# Altium PCB door_clock_ver2.PcbDoc
Units mil, origin at the board's own origin, x right, y up, seen from the top; angles counter-clockwise.
Board outline 3940 x 4715 mil, 2 copper layers (Top Layer, Bottom Layer); 32 components, 49 nets, 122 pads, 0 vias.
Unrouted connection lines stored in the file: 3.
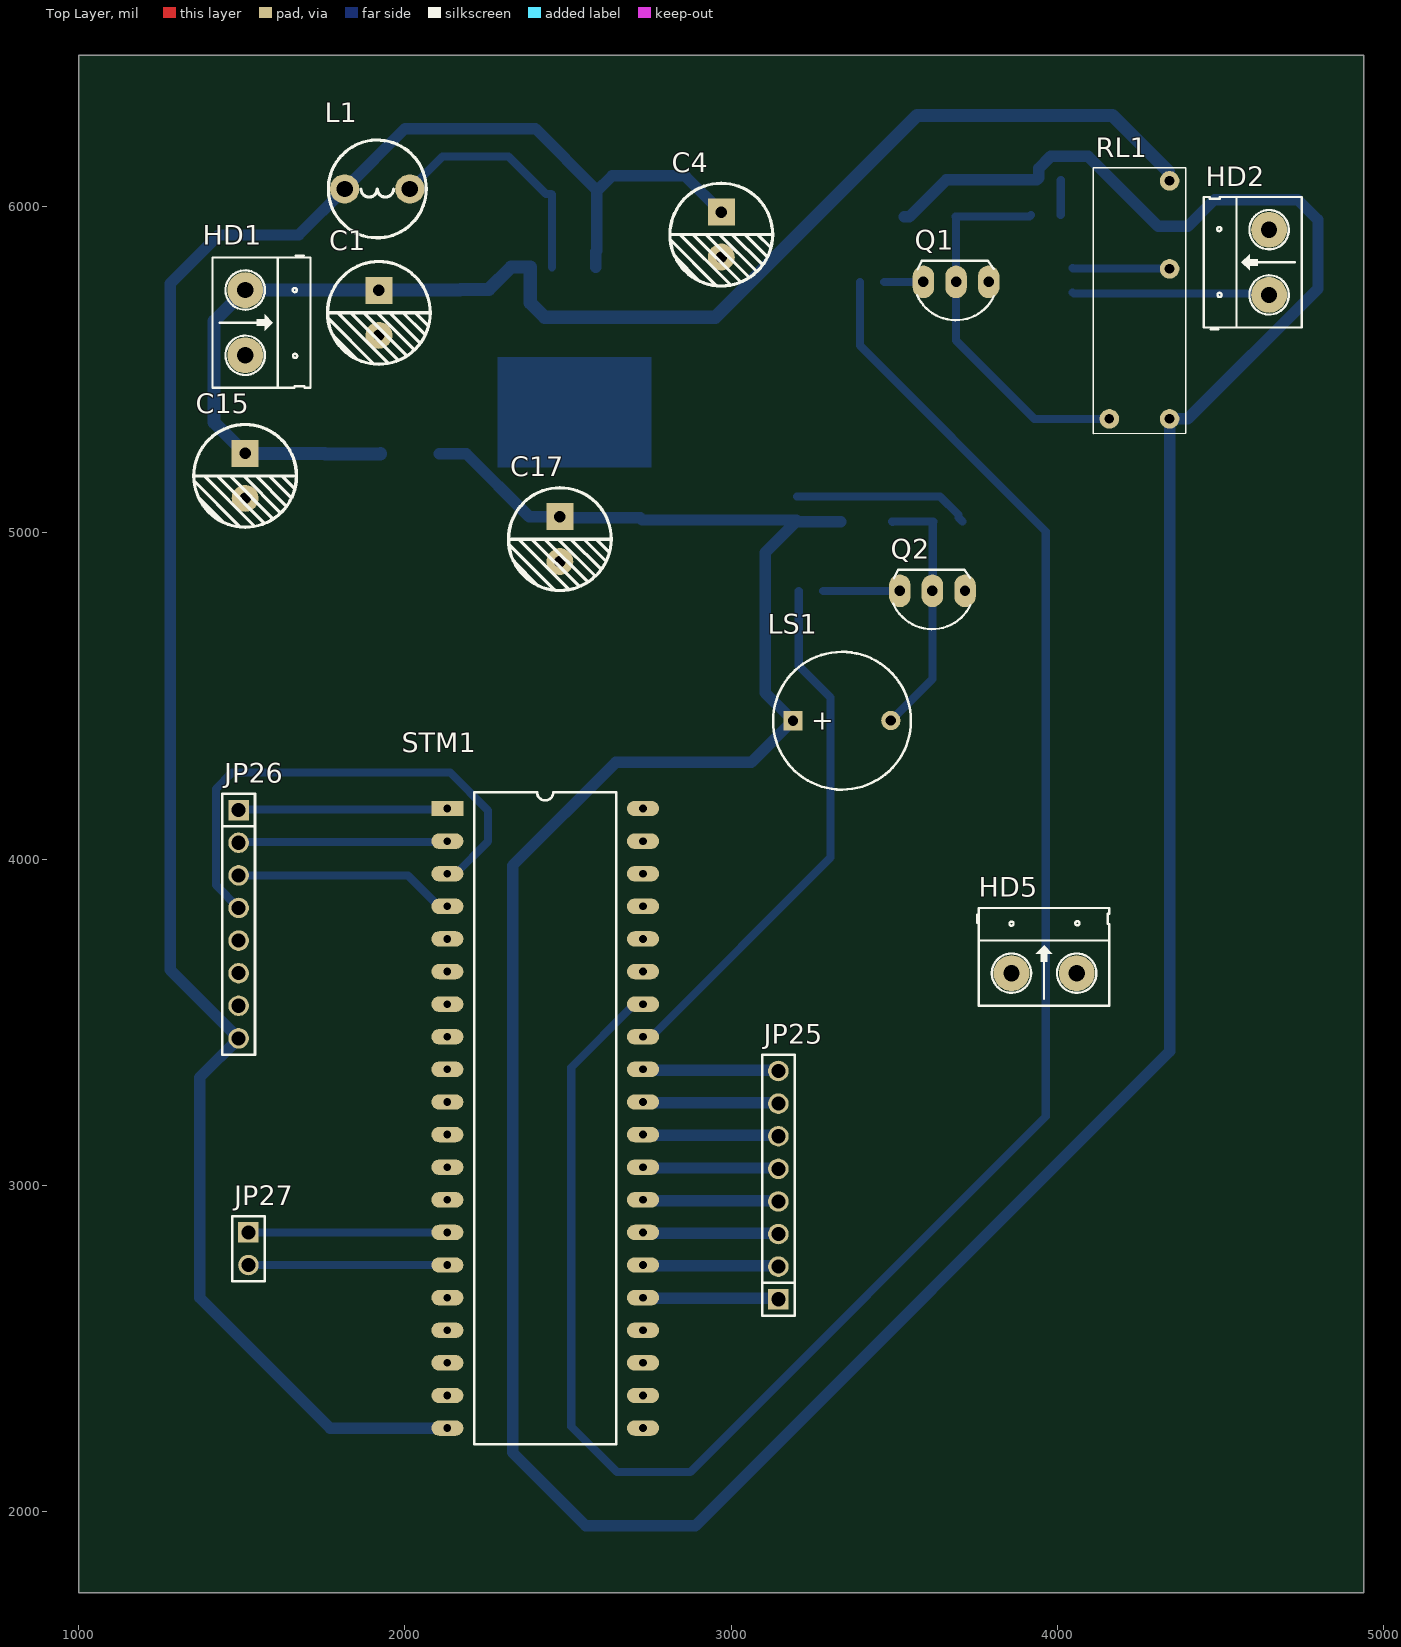
[diagram p0: Top Layer view]
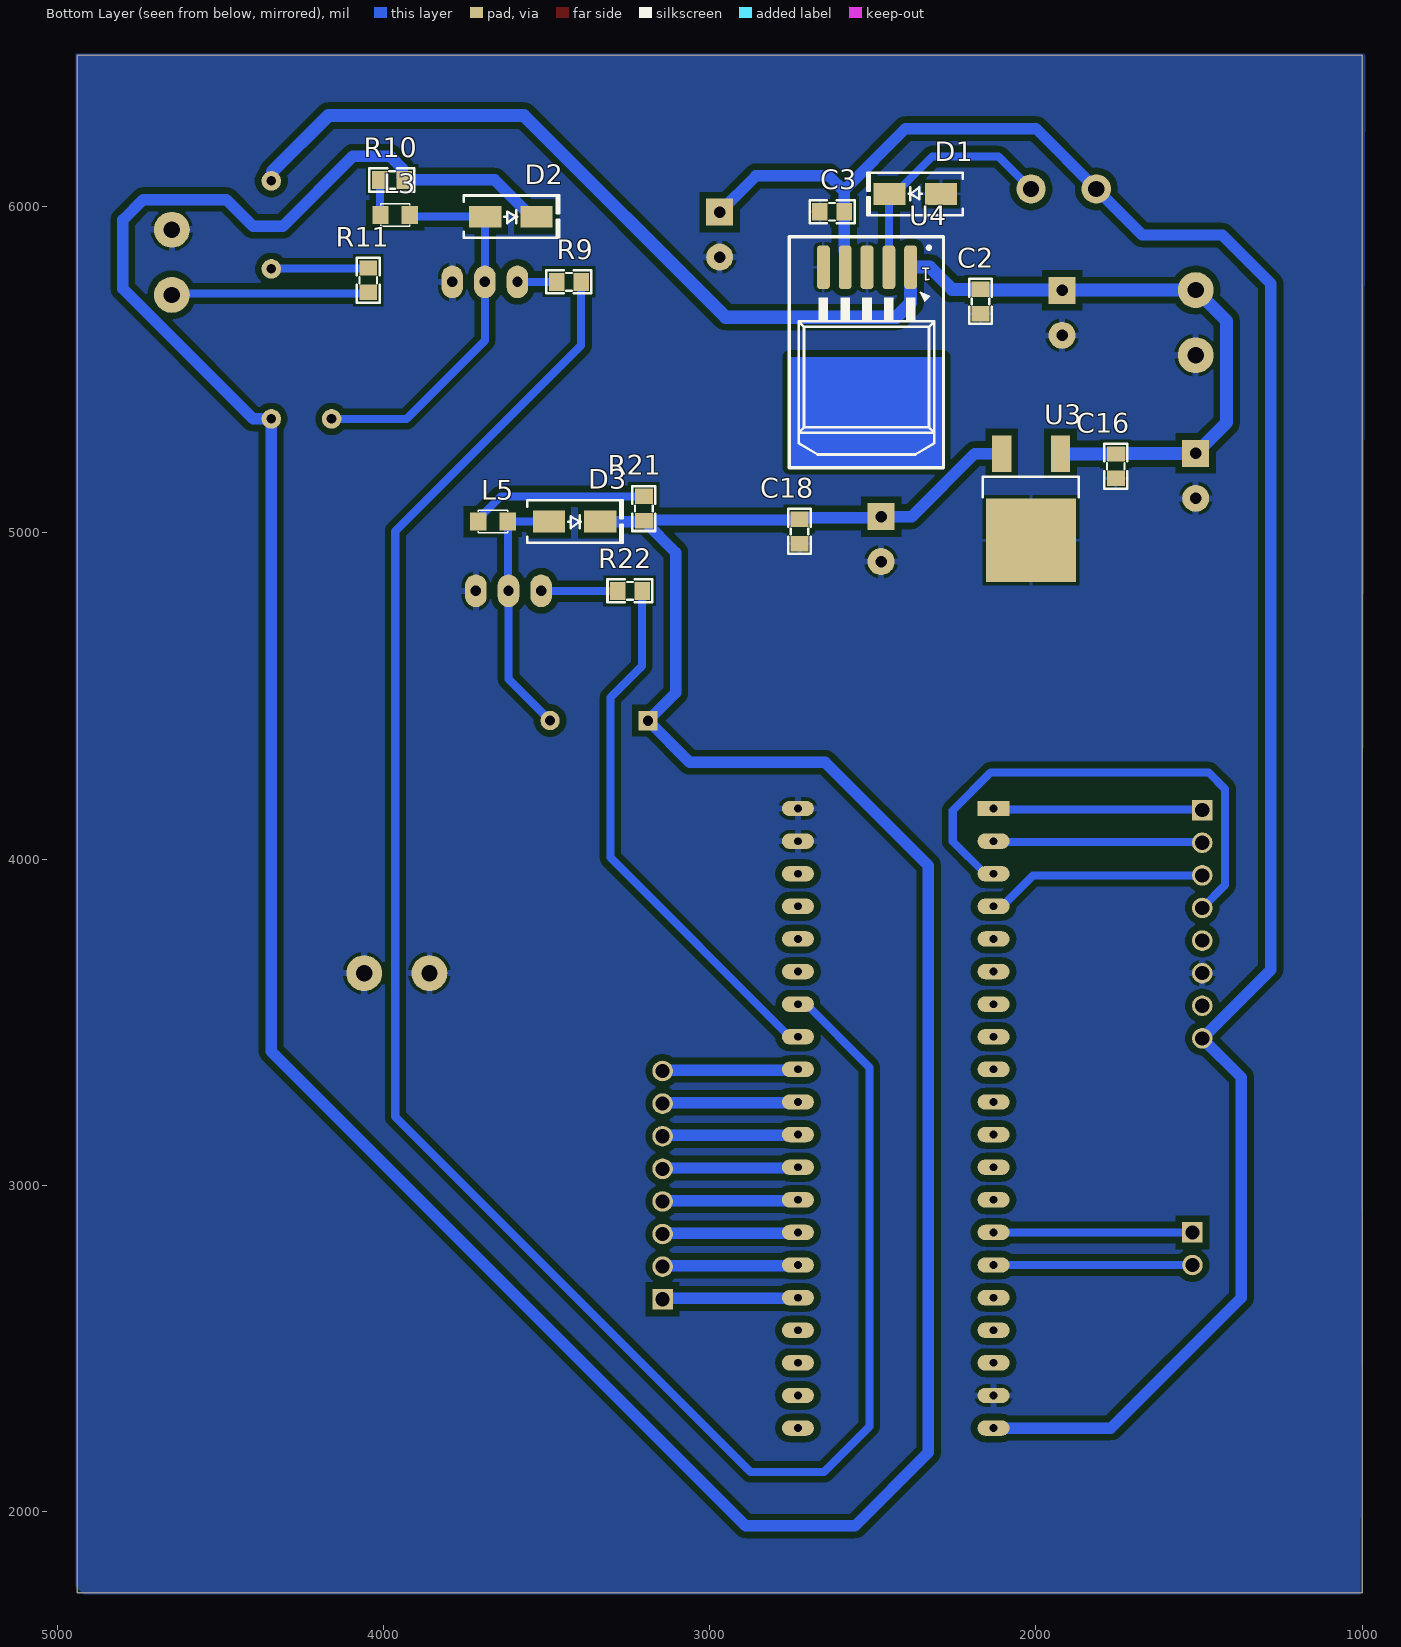
[diagram p1: Bottom Layer view, seen from below]
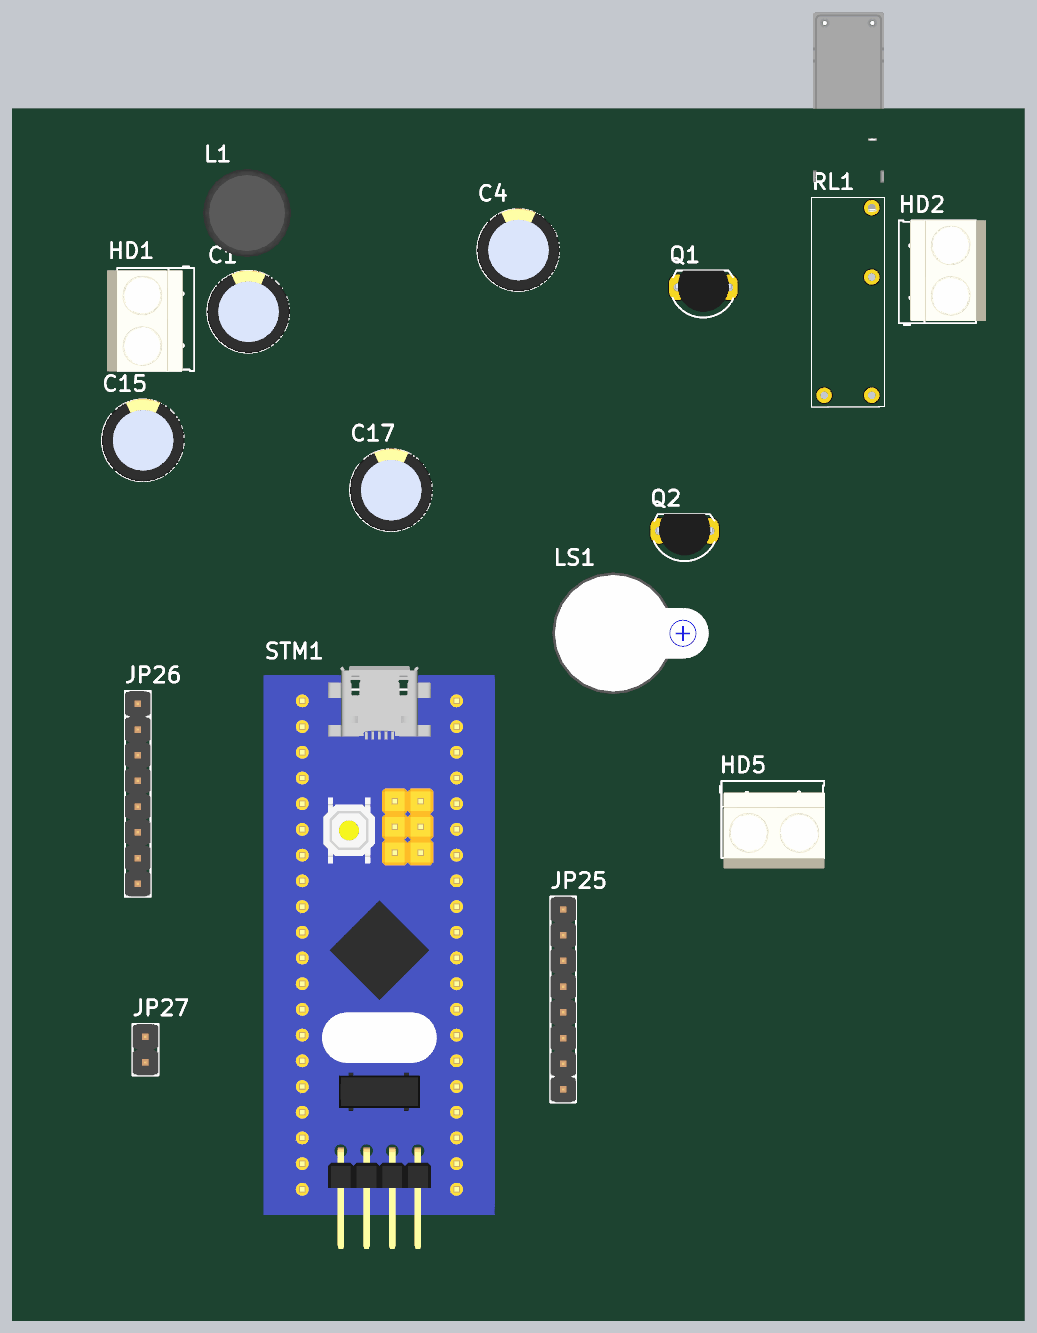
[diagram p2: 3D render of the assembled board from above, using the file's embedded part models]
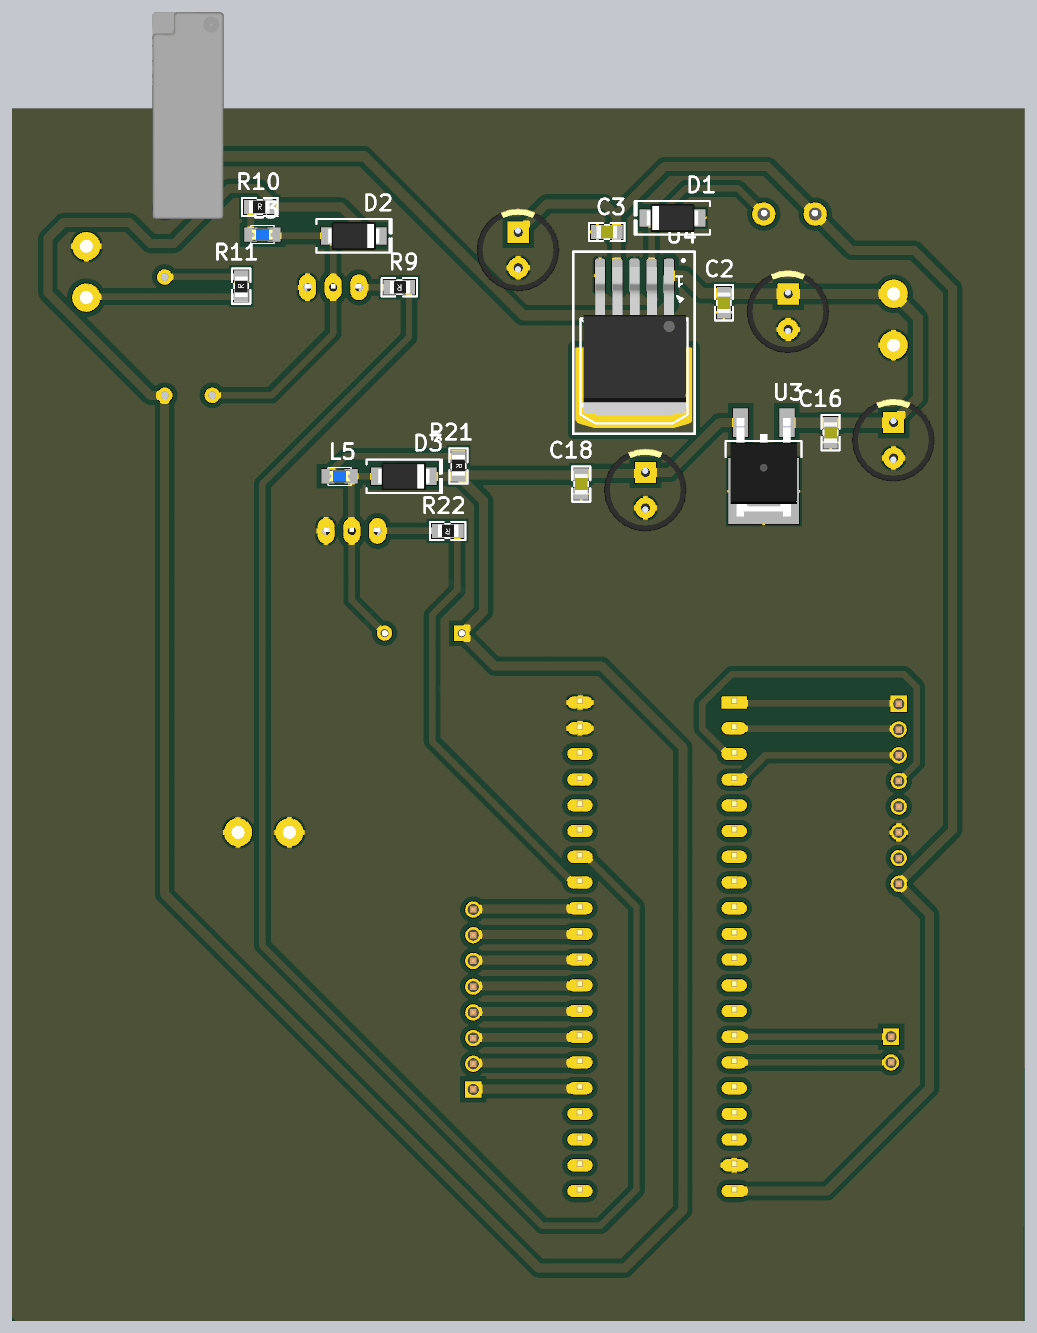
[diagram p3: 3D render of the assembled board from below, using the file's embedded part models]

## Layer stack, top to bottom
Top Solder: solder mask 0.4, Solder Resist, Dk 3.5
Top Layer: signal copper 1.4
Dielectric 1: dielectric 12.6, FR-4, Dk 4.8
Bottom Layer: signal copper 1.4
Bottom Solder: solder mask 0.4, Solder Resist, Dk 3.5

## Board outline
1000,1750 4940,1750 4940,6465 1000,6465

## Design rules (kind name [scope] priority, off if disabled: settings)
Clearance Clearance_9 [InNamedPolygon('NONET_L02_P000')] p1: gap=20 ignorepadtopadclearanceinfootprint=FALSE
Clearance Clearance_8 [InNamedPolygon('NONET_L02_P000')] p2: gap=20 ignorepadtopadclearanceinfootprint=FALSE
Clearance Clearance_7 [InNamedPolygon('NONET_L02_P000')] p3: gap=20 ignorepadtopadclearanceinfootprint=FALSE
Clearance Clearance_6 [InNamedPolygon('NONET_L02_P000')] p4: gap=20 ignorepadtopadclearanceinfootprint=FALSE
Clearance Clearance_5 [InNamedPolygon('NONET_L02_P000')] p5: gap=20 ignorepadtopadclearanceinfootprint=FALSE
Clearance Clearance_4 [InNamedPolygon('NONET_L02_P000')] p6: gap=20 ignorepadtopadclearanceinfootprint=FALSE
Clearance Clearance_3 [InNamedPolygon('NONET_L02_P000')] p7: gap=20 ignorepadtopadclearanceinfootprint=FALSE
Clearance Clearance_2 [InNamedPolygon('NONET_L02_P000')] p8: gap=20 ignorepadtopadclearanceinfootprint=FALSE
Clearance Clearance_1 [InNamedPolygon('GND_L02_P001')] p9: gap=20 ignorepadtopadclearanceinfootprint=FALSE
Clearance [All] p10: gap=20 ignorepadtopadclearanceinfootprint=FALSE
PolygonConnect PolygonConnect_9 [All vs IsNamedPolygon('NONET_L02_P000')] p1: thpad.connectstyle=Relief thpad.reliefconductorwidth=20 thpad.reliefentries=4 thpad.polygonreliefangle="90 Angle" thpad.airgapwidth=10 smdpad.connectstyle=Relief smdpad.reliefconductorwidth=10 smdpad.reliefentries=4 smdpad.polygonreliefangle="90 Angle" smdpad.airgapwidth=10 via.connectstyle=Relief via.reliefconductorwidth=20 via.reliefentries=4 via.polygonreliefangle="90 Angle" via.airgapwidth=10
PolygonConnect PolygonConnect_8 [All vs IsNamedPolygon('NONET_L02_P000')] p2: thpad.connectstyle=Relief thpad.reliefconductorwidth=20 thpad.reliefentries=4 thpad.polygonreliefangle="90 Angle" thpad.airgapwidth=10 smdpad.connectstyle=Relief smdpad.reliefconductorwidth=10 smdpad.reliefentries=4 smdpad.polygonreliefangle="90 Angle" smdpad.airgapwidth=10 via.connectstyle=Relief via.reliefconductorwidth=20 via.reliefentries=4 via.polygonreliefangle="90 Angle" via.airgapwidth=10
PolygonConnect PolygonConnect_7 [All vs IsNamedPolygon('NONET_L02_P000')] p3: thpad.connectstyle=Relief thpad.reliefconductorwidth=20 thpad.reliefentries=4 thpad.polygonreliefangle="90 Angle" thpad.airgapwidth=10 smdpad.connectstyle=Relief smdpad.reliefconductorwidth=10 smdpad.reliefentries=4 smdpad.polygonreliefangle="90 Angle" smdpad.airgapwidth=10 via.connectstyle=Relief via.reliefconductorwidth=20 via.reliefentries=4 via.polygonreliefangle="90 Angle" via.airgapwidth=10
PolygonConnect PolygonConnect_6 [All vs IsNamedPolygon('NONET_L02_P000')] p4: thpad.connectstyle=Relief thpad.reliefconductorwidth=20 thpad.reliefentries=4 thpad.polygonreliefangle="90 Angle" thpad.airgapwidth=10 smdpad.connectstyle=Relief smdpad.reliefconductorwidth=10 smdpad.reliefentries=4 smdpad.polygonreliefangle="90 Angle" smdpad.airgapwidth=10 via.connectstyle=Relief via.reliefconductorwidth=20 via.reliefentries=4 via.polygonreliefangle="90 Angle" via.airgapwidth=10
PolygonConnect PolygonConnect_5 [All vs IsNamedPolygon('NONET_L02_P000')] p5: thpad.connectstyle=Relief thpad.reliefconductorwidth=20 thpad.reliefentries=4 thpad.polygonreliefangle="90 Angle" thpad.airgapwidth=10 smdpad.connectstyle=Relief smdpad.reliefconductorwidth=10 smdpad.reliefentries=4 smdpad.polygonreliefangle="90 Angle" smdpad.airgapwidth=10 via.connectstyle=Relief via.reliefconductorwidth=20 via.reliefentries=4 via.polygonreliefangle="90 Angle" via.airgapwidth=10
PolygonConnect PolygonConnect_4 [All vs IsNamedPolygon('NONET_L02_P000')] p6: thpad.connectstyle=Relief thpad.reliefconductorwidth=20 thpad.reliefentries=4 thpad.polygonreliefangle="90 Angle" thpad.airgapwidth=10 smdpad.connectstyle=Relief smdpad.reliefconductorwidth=10 smdpad.reliefentries=4 smdpad.polygonreliefangle="90 Angle" smdpad.airgapwidth=10 via.connectstyle=Relief via.reliefconductorwidth=20 via.reliefentries=4 via.polygonreliefangle="90 Angle" via.airgapwidth=10
PolygonConnect PolygonConnect_3 [All vs IsNamedPolygon('NONET_L02_P000')] p7: thpad.connectstyle=Relief thpad.reliefconductorwidth=20 thpad.reliefentries=4 thpad.polygonreliefangle="90 Angle" thpad.airgapwidth=10 smdpad.connectstyle=Relief smdpad.reliefconductorwidth=10 smdpad.reliefentries=4 smdpad.polygonreliefangle="90 Angle" smdpad.airgapwidth=10 via.connectstyle=Relief via.reliefconductorwidth=20 via.reliefentries=4 via.polygonreliefangle="90 Angle" via.airgapwidth=10
PolygonConnect PolygonConnect_2 [All vs IsNamedPolygon('NONET_L02_P000')] p8: thpad.connectstyle=Relief thpad.reliefconductorwidth=20 thpad.reliefentries=4 thpad.polygonreliefangle="90 Angle" thpad.airgapwidth=10 smdpad.connectstyle=Relief smdpad.reliefconductorwidth=10 smdpad.reliefentries=4 smdpad.polygonreliefangle="90 Angle" smdpad.airgapwidth=10 via.connectstyle=Relief via.reliefconductorwidth=20 via.reliefentries=4 via.polygonreliefangle="90 Angle" via.airgapwidth=10
PolygonConnect PolygonConnect_1 [All vs IsNamedPolygon('GND_L02_P001')] p9: thpad.connectstyle=Relief thpad.reliefconductorwidth=20 thpad.reliefentries=4 thpad.polygonreliefangle="90 Angle" thpad.airgapwidth=10 smdpad.connectstyle=Relief smdpad.reliefconductorwidth=10 smdpad.reliefentries=4 smdpad.polygonreliefangle="90 Angle" smdpad.airgapwidth=10 via.connectstyle=Relief via.reliefconductorwidth=20 via.reliefentries=4 via.polygonreliefangle="90 Angle" via.airgapwidth=10
PolygonConnect [All] p10: connectstyle=Relief reliefconductorwidth=10 reliefentries=4 polygonreliefangle="90 Angle" airgapwidth=10
RoutingVias [All] p1: holewidth=28 width=50 viastyle="Through Hole" minholewidth=28 minwidth=50 maxholewidth=28 maxwidth=50
SolderMaskExpansion [All] p1: expansion=4 istentingtop=FALSE
Width [All] p1: maxlimit=40 minlimit=25 preferedwidth=35 minimp=50.000000 maximp=50.000000 favimp=50.000000
30 further rules are at their usual default settings.

## Components (designator, comment, footprint, x,y, rotation, side; value= is the part's Value field where it differs from the comment)
C1 "100uF" "tu hoa 8mm" 1920,5675 r270 top
C2 "104" "tu 0805" 2170,5710 r270 bottom
C3 "104" "tu 0805" 2625,5985 r0 bottom
C4 "100uF" "tu hoa 8mm" 2970,5915 r270 top
C15 "100uF" "tu hoa 8mm" 1510,5175 r270 top
C16 "104" "tu 0805" 1755,5205 r270 bottom
C17 "100uF" "tu hoa 8mm" 2475,4981.1 r270 top
C18 "104" "tu 0805" 2725,5005 r270 bottom
D1 "SS34" "DIODE SMA" 2370,6040 r0 bottom
D2 "SS14" "DIODE SMA" 3610,5970 r180 bottom
D3 "SS14" "DIODE SMA" 3415,5035 r180 bottom
HD1 "Header 2" HED2 1510,5745 r270 top
HD2 "Header 2" HED2 4650,5730 r90 top
HD5 "Header 2" HED2 3860,3650 r0 top
JP25 "keypad" "JP 1x8 DT" 3145,2650 r90 top
JP26 "RFID" "JP 1x8 DT" 1490,4150 r270 top
JP27 "LCD_I2C" "JP 1x2 DT" 1520,2855 r270 top
L1 "470uH - 3A" "CUON CAM 100uH3A" 1915,6055 r180 top
L3 "LED 0805" LED-0805-Blue 4010,5975 r180 bottom
L5 "LED 0805" LED-0805-Blue 3710,5035 r180 bottom
LS1 "Coi Chip Speaker" "Coi Chip Speacker" 3190,4424.5 r0 top
Q1 "C1815" TO92 3690,5770 r180 top value=C9014
Q2 "C1815" TO92 3617.5,4822.5 r180 top value=C9014
R9 "1k" "tro smd 0805" 3432.23,5767.61 r0 bottom
R10 "330R" "Tro SMD 0805" 3975,6085 r180 bottom
R11 "330R" "Tro SMD 0805" 4050,5775 r90 bottom
R21 "330R" "Tro SMD 0805" 3200,5075 r270 bottom
R22 "1k" "tro smd 0805" 3245,4820 r0 bottom
RL1 "RelayHF46" "Relay 4 chan HF46F" 4345,5350 r270 top
STM1 "KIT STM32F103C8T6" "STM32F103 KIT" 2130,4155 r0 top
U3 "L7805CDT-TR" DPAK_118_446_112X59_SMD 2010,5085 r270 bottom
U4 "LM2976" TO263 2503.07,5580 r0 bottom

## Footprints (in the part's own frame and the unit in brackets; to place one, negate y for a bottom-side part, rotate by r counter-clockwise, add the part's x,y. Pads: shape width x height; smd on the part's side, far side on the other; paste and mask are expansions set on the pad)
"Coi Chip Speacker" [mm]
  rect 1.5x1.5 hole 0.8: 1(0,0)
  round 1.5 hole 0.8: 2(7.62,0.013)
  silkscreen extent -1.55,-5.38 9.18,5.36, body extent -2.22,-6 13.24,6, height 4.5
"CUON CAM 100uH3A" [mil] "100uH3A"
  round 90 hole 50: 1(-100,0) 2(100,0)
  silkscreen extent -150,-150 150,150, body extent -171,-175 171,167, height 394
"DIODE SMA" [mm] "SMA"
  rect 2.5x1.7 smd: 1(-2,0) 2(2,0)
  silkscreen extent -3.68,-1.65 3.75,1.65, body extent -2.6,-1.37 2.6,1.37, height 2.4
DPAK_118_446_112X59_SMD [mm] "CASE: DPAK"
  rect 2.85x1.5 smd: 1(-4.023,2.163) 3(-4.023,-2.417)
  rect 6.5x7 smd: 2(2.727,-0.127)
  silkscreen extent -2.22,-3.9 -0.62,3.6, body extent -4.47,-3.43 5.23,3.15, height 2.3
HED2 [mil] "Header 2, 2 pin, hight 300mil, Pin to Pin 200, Colour Green"
  round 110 hole 50: 1(0,0) 2(200,0)
  silkscreen extent -106,-100 300,200, body extent -92,-140 302,155, height 394
"JP 1x2 DT" [mm] "2 pins, 1 row, straight, gold plating"
  rect 1.6x1.6 hole 1.1: 1(0,0)
  round 1.6 hole 1.1: 2(2.54,0)
  silkscreen extent -1.27,-1.27 3.81,1.27, body extent -1.27,-1.27 3.81,1.27, height 8.54
"JP 1x8 DT" [mm] "8 pins, 1 row, straight, gold plating"
  rect 1.6x1.6 hole 1.1: 1(0,0)
  round 1.6 hole 1.1: 2(2.54,0) 3(5.08,0) 4(7.62,0) 5(10.16,0) 6(12.7,0) 7(15.24,0) 8(17.78,0)
  silkscreen extent -1.27,-1.27 19.05,1.27, body extent -1.27,-1.27 19.05,1.27, height 8.54
LED-0805-Blue [mil]
  rect 50x55 smd: 1(0,0) 2(90,0)
  silkscreen extent 0,-35 90,35, body extent 5,-25 85,25, height 43
"Relay 4 chan HF46F" [mil]
  round 60 hole 30: 1(0,0) 2(0,-185.04) 3(-460,0) 4(-730,0)
  silkscreen extent -770,-235 46,50, body extent -763,-228 40,48, height 154
"STM32F103 KIT" [mm]
  rect 2.5x1.2 hole 0.6: 1(0,0)
  oval 2.5x1.2 hole 0.6: 2(0,-2.54) 3(0,-5.08) 4(0,-7.62) 5(0,-10.16) 6(0,-12.7) 7(0,-15.24) 8(0,-17.78) 9(0,-20.32) 10(0,-22.86) 11(0,-25.4) 12(0,-27.94) 13(0,-30.48) 14(0,-33.02) 15(0,-35.56) 16(0,-38.1) 17(0,-40.64) 18(0,-43.18) 19(0,-45.72) 20(0,-48.26) 21(15.24,-48.26) 22(15.24,-45.72) 23(15.24,-43.18) 24(15.24,-40.64) 25(15.24,-38.1) 26(15.24,-35.56) 27(15.24,-33.02) 28(15.24,-30.48) 29(15.24,-27.94) 30(15.24,-25.4) 31(15.24,-22.86) 32(15.24,-20.32) 33(15.24,-17.78) 34(15.24,-15.24) 35(15.24,-12.7) 36(15.24,-10.16) 37(15.24,-7.62) 38(15.24,-5.08) 39(15.24,-2.54) 40(15.24,0)
  silkscreen extent 2.08,-49.53 13.16,1.27, body extent -3.81,-53.97 19.05,3.59, height 16.12
TO92 [mil] "TO-92"
  oval 66x100 hole 32: 1(-100,0) 2(0,0) 3(100,0)
  silkscreen extent -117,-65 120,118, body extent -109,-66 109,95, height 245
TO263 [mm]
  rrect50% 1x3.4 smd: 1(-3.019,-5.969) 2(-1.319,-5.969) 4(2.081,-5.969) 5(3.781,-5.969)
  rrect50% 1x3.4 smd mask+0: 3(0.381,-5.969)
  Top Layer region: -5.568,9.65 6.432,9.65 6.432,1.016 -5.568,1.016
  silkscreen extent -5.57,-8.35 6.43,9.65, body extent -4.73,-6.84 5.43,7.8, height 4.57
"tro smd 0805" [mm]
  rect 1.2x1.4 smd: 1(-0.946,-0.061) 2(0.954,-0.061)
  silkscreen extent -1.75,-0.97 1.75,0.84, body extent -1.56,-0.76 1.44,0.64, height 0.53
"Tro SMD 0805" [mm]
  rect 1.2x1.4 smd: 1(-0.946,-0.061) 2(0.954,-0.061)
  silkscreen extent -1.75,-0.97 1.75,0.84, body extent -1.56,-0.76 1.44,0.64, height 0.53
"tu 0805" [mm] "Compoment SMD 80x50mil"
  rect 1.2x1.4 smd: 1(-0.946,-0.003) 2(0.954,-0.003)
  silkscreen extent -1.75,-0.89 1.75,0.89, body extent -1.01,-0.64 1.01,0.63, height 0.61
"tu hoa 8mm" [mm]
  rect 2.1x2.1 hole 0.9: 1(-1.75,0)
  round 2.1 hole 0.9: 2(1.75,0)
  silkscreen extent -4,-4 4,4, body extent -4.1,-4.07 4.1,4.13, height 13.81

## Part data
C1 C4 C15 C17: library part "Tu Hoa 100uF 50V 8x11", "Cắm", Chung_Loai=Cắm, Don_Vi=Con, Ma_Hang=MH006872, So_Chan=2, Ten_Linh_Kien="Tụ Hóa 100uF 50V 8x11MM"
C2 C3 C16 C18: library part "Tu 0805 104 50V 10%", "Dán", Chung_Loai=Dán, Don_Vi=Con, Ma_Hang=MH004551, So_Chan=2, Ten_Linh_Kien="Tụ 0805 104-100nF 10% 50V"
D1: library part "Diode SS34 ( 1N5822 )", "Dán", Chung_Loai=Dán, Don_Vi=Con, Ma_Hang=MH002104, Ten_Linh_Kien="Diode SS34 3A 40V SMA ( 1N5822 SS34A)"
D2 D3: library part "Diode SS14 ( 1N5819)", "Dán", Chung_Loai=Dán, Don_Vi=Con, Ma_Hang=MH002211, Ten_Linh_Kien="Diode SS14 DO214 Schottky 1A 40V ( 1N5819 DO214)"
HD1 HD2 HD5: library part Hed2, "Header 2 (Green)"
JP25 JP26: library part "JP 1x8 2.54 Duc Thang", "Cắm", Chung_Loai=Cắm, Don_Vi=Con, Ma_Hang=MH000903, Ten_Linh_Kien="Jump Đơn Đực 2.54MM 1x40P Thẳng 11MM"
JP27: library part "JP 1x2 2.54 Duc Thang", "Cắm", Chung_Loai=Cắm, Don_Vi=Con, Ma_Hang=MH000903, Ten_Linh_Kien="Jump Đơn Đực 2.54MM 1x40P Thẳng 11MM"
L1: library part "CUON CAM 470uH DIP", "Cắm", Chung_Loai=Cắm, Don_Vi=Con, Ma_Hang=MH002232, Ten_Linh_Kien="Cuộn Cảm 470uH 3A 8x10MM"
L3 L5: library part "LED 0805 Xanh Duong", "Dán", Chung_Loai=Dán, Don_Vi=Con, Ma_Hang=MH002327, Ten_Linh_Kien="LED 0805 Màu Xanh Dương (Blue)"
LS1: "Còi chip"
Q1 Q2: library part "Trans C1815 DIP", "NPN transistor"
R9 R22: library part "Tro 0805 1% 1k", "Dán", Chung_Loai=Dán, Don_Vi=Con, Ma_Hang=MH005468, So_Chan=2, Ten_Linh_Kien="Trở 0805 1% 1k"
R10 R11 R21: library part "Tro 0805 5% 330R", "Dán", Chung_Loai=Dán, Don_Vi=Con, Ma_Hang=MH005337, So_Chan=2, Ten_Linh_Kien="Trở 0805 5% 330R"
RL1: library part "Relay 4 chan HF46F", "Relay 4 chan HF46F", Ma_Hang=MH003879, Ten="Relay 5V5A HF46F-G 5-HS1"
STM1: library part "STM32f103 Bluepill", "KIT STM32F103C8T6 Bluepill"
U3: library part REG_35V_5V-1.5A-7.5W-DPAK, "Linear Voltage Regulator IC 1 Output 1.5A DPAK", Alternate Part Number-1="CJ7805 3%", Case/Package=DPAK, Manufacturer=Diodes, Manufacturer Part Number=L7805CDT-TR, Supplier Part Number-1=L7805CDT-TR, Supplier-1="SP ROAD"
U4: library part LM2596, Max Input Voltage="12 V", Max Output Current="3 (6.0 peak) A", Max Output Voltage=mV, Temperature Range="-40 to +125 degC", Category=IC-Power, Min Input Voltage=mV, Min Output Voltage=mV, Mounting Technology="Surface Mount", Status=Unreleased, Supply Voltage=mV

## Nets (pads, with @x,y where several pads share a name; then routed paths per layer and width w, separated by ;. In a path a pad name is that pad's centre, name@x,y a point inside that pad or via, vN(x,y) a via of type N, cw(c..) or ccw(c..) an arc to the next point about the centre after c; other vN are vias at no path point)
3V3: STM1.38
5v: C17.1 C18.1 D2.2 D3.2 LS1.1 R10.2 R21.2 RL1.1 U3.3 | length 11841.8
  Bottom Layer w35: U3.3 2187.51,5243.39 2380.9,5050 C17.1 2478.89,5046.11 2721.25,5046.11 C18.1 2727.54,5039.83 3199.99,5039.83 R21.2 ; D3.2 3199.97,5035 3105,4940.03 3105,4509.5 LS1.1 3061.89,4296.39 2646.39,4296.39 2330,3980 2330,2180 2555,1955 2890,1955 4345,3410 RL1.1 4400.81,5350 4800,5749.19 4800,5960 4737.5,6022.5 4482.91,6022.5 4400.41,5940 4310,5940 4095,6155 3980.41,6155 3943.55,6118.14 3943.55,6088.73 R10.2 3659.61,6082.61 3547.01,5970 D2.2
A0: JP25.1 STM1.25 | length 417.1
  Bottom Layer w35: STM1.25 2732.34,2652.66 3142.34,2652.66 JP25.1
A1: JP25.2 STM1.26 | length 417.1
  Bottom Layer w35: STM1.26 2732.34,2752.66 3142.34,2752.66 JP25.2
A2: JP25.3 STM1.27 | length 417.1
  Bottom Layer w35: STM1.27 2732.34,2852.66 3142.34,2852.66 JP25.3
A3: JP25.4 STM1.28 | length 417.1
  Bottom Layer w35: STM1.28 2732.34,2952.66 3142.34,2952.66 JP25.4
A4: JP25.5 STM1.29 | length 417.1
  Bottom Layer w35: STM1.29 2732.34,3052.66 3142.34,3052.66 JP25.5
A5: JP25.6 STM1.30 | length 417.1
  Bottom Layer w35: STM1.30 2732.34,3152.66 3142.34,3152.66 JP25.6
A6: JP25.7 STM1.31 | length 417.1
  Bottom Layer w35: STM1.31 2732.34,3252.66 3142.34,3252.66 JP25.7
A7: JP25.8 STM1.32 | length 417.1
  Bottom Layer w35: STM1.32 2732.34,3352.66 3142.34,3352.66 JP25.8
A8: STM1.5
A9: STM1.6
A10: STM1.7
A11: STM1.8
A12: STM1.9
A15: STM1.10
B0: R22.1 STM1.33 | length 1660.8
  Bottom Layer w25: STM1.33 2755.59,3455 3305,4004.41 3305,4495 3207.77,4592.23 R22.1
B1: R9.1 STM1.34 | length 6161.7
  Bottom Layer w25: STM1.34 2704.41,3555 2510,3360.59 2510,2260 2650,2120 2875,2120 3965,3210 3965,5005 3395,5575 R9.1
B3: STM1.11
B4: STM1.12
B5: STM1.13
B6: JP27.1 STM1.14 | length 610
  Bottom Layer w25: JP27.1 STM1.14
B7: JP27.2 STM1.15 | length 610
  Bottom Layer w25: JP27.2 STM1.15
B8: STM1.16
B9: STM1.17
B10: STM1.35
B11: STM1.36
B12: JP26.1 STM1.1 | length 642.1
  Bottom Layer w25: JP26.1 1492.5,4152.5 2127.5,4152.5 STM1.1
B13: JP26.2 STM1.2 | length 642.1
  Bottom Layer w25: JP26.2 1492.5,4052.5 2127.5,4052.5 STM1.2
B14: JP26.4 STM1.3 | length 1558.4
  Bottom Layer w25: JP26.4 1420,3920 1420,4215 1470,4265 2138.8,4265 2255,4148.8 2255,4054.41 2155.59,3955 STM1.3
B15: JP26.3 STM1.4 | length 679.4
  Bottom Layer w25: JP26.3 2009.41,3950 2104.41,3855 STM1.4
C13: STM1.22
C14: STM1.23
C15: STM1.24
GND: C1.2 C2.2 C3.2 C4.2 C15.2 C16.2 C17.2 C18.2 D1.1 HD1.2 HD2.2 HD5.1 HD5.2 JP26.6 Q1.1 Q2.1 STM1.19 STM1.39 STM1.40 U3.2 U4.3 U4.5
NetD1_2: D1.2 L1.1 U4.2 | length 748.8
  Bottom Layer w25: L1.1 2115,6155 2317.99,6155 2432.99,6040 D1.2 2451.14,6037.6 U4.2
NetD2_1: D2.1 L3.2 Q1.2 RL1.2 | length 1183.2
  Bottom Layer w25: L3.2 3915,5970 D2.1 3690,5968.74 Q1.2 3690,5590 3930,5350 RL1.2
NetD3_1: D3.1 L5.2 LS1.2 Q2.2 | length 791.9
  Bottom Layer w25: LS1.2 3617.5,4552.5 Q2.2 3618.75,4823.75 3618.75,5033.75 L5.2 D3.1 D3.1@3495,5033.74
NetHD2_1: HD2.1 R11.1 | length 605.6
  Bottom Layer w25: R11.1 4051.49,5733.89 4646.11,5733.89 HD2.1
NetL3_1: L3.1 R10.1 | length 108.5
  Bottom Layer w25: L3.1 4011.11,5976.11 4011.11,6081.49 R10.1
NetL5_1: L5.1 R21.1 | length 544.6
  Bottom Layer w25: R21.1 3641.23,5112.23 3697.5,5055.96 3697.5,5047.5 L5.1
NetQ1_3: Q1.3 R9.2 | length 120.2
  Bottom Layer w25: R9.2 Q1.3
NetQ2_3: Q2.3 R22.2 | length 235
  Bottom Layer w25: R22.2 R22.2 3517.45,4822.45 Q2.3
NetR11_2: R11.2 RL1.3 | length 298.5
  Bottom Layer w25: R11.2 4048.89,5811.29 4343.71,5811.29 RL1.3
RESET: STM1.37
VBAT: STM1.21
VCC3V3: C3.1 C4.1 JP26.8 L1.2 STM1.20 U4.4 | length 6440.9
  Bottom Layer w35: STM1.20 1770,2255 1370,2655 1370,3330 JP26.8 1280,3660 1280,5765 1428.9,5913.9 1673.9,5913.9 L1.2 2000,6240 2400,6240 2587.77,6052.23 2587.77,6047.77 ; U4.4 2585,5862.24 2587.77,5865.02 C3.1 2587.77,6047.77 ; C4.1 2858.9,6095 2635,6095 2587.77,6047.77
VCC5V: STM1.18
Vin: C1.1 C2.1 C15.1 C16.1 HD1.1 RL1.4 U3.1 U4.1 | length 4341.9
  Bottom Layer w40: U3.1 1924.26,5242.81 1755.71,5242.81 C16.1 1754.3,5243.06 1510.83,5243.06 1415,5338.9 1415,5650 HD1.1 1510.55,5744.45 1919.45,5744.45 C1.1 1921.67,5745.56 2168.47,5745.56 C2.1 2257.23,5747.23 2325,5815 U4.1 2384.21,5705.79 2428.43,5661.57 2951.57,5661.57 3570,6280 4170,6280 4341.17,6108.83 4341.17,6083.83 RL1.4
pads on no net: JP26.5 JP26.7

## Polygon pours and split planes (outlines as drawn)
GND on Bottom Layer "GND_L02_P000" (solid, remove dead copper, pour order 0): 990,6465 995,6470 4945,6470 4945,1770 4920,1745 1005,1745

## Text inside footprints (layer, text, board x,y; h text height)
LS1: Top Overlay "+" at 3245.5,4396.5 h60
U4: Bottom Overlay "1" at 2320.21,5813 h39.37 r180